# Altium PCB Dual-MCU-control-board.PcbDoc (part 3 of 3)
Units mm, origin at the board's own origin, x right, y up, seen from the top; angles counter-clockwise.
Board outline 69.24 x 57.01 mm, 4 copper layers (L1 SIGNAL, L2 GROUND, L3 GROUND, L4 SIGNAL), stack 1.571 mm thick; 90 components, 69 nets, 374 pads, 126 vias.
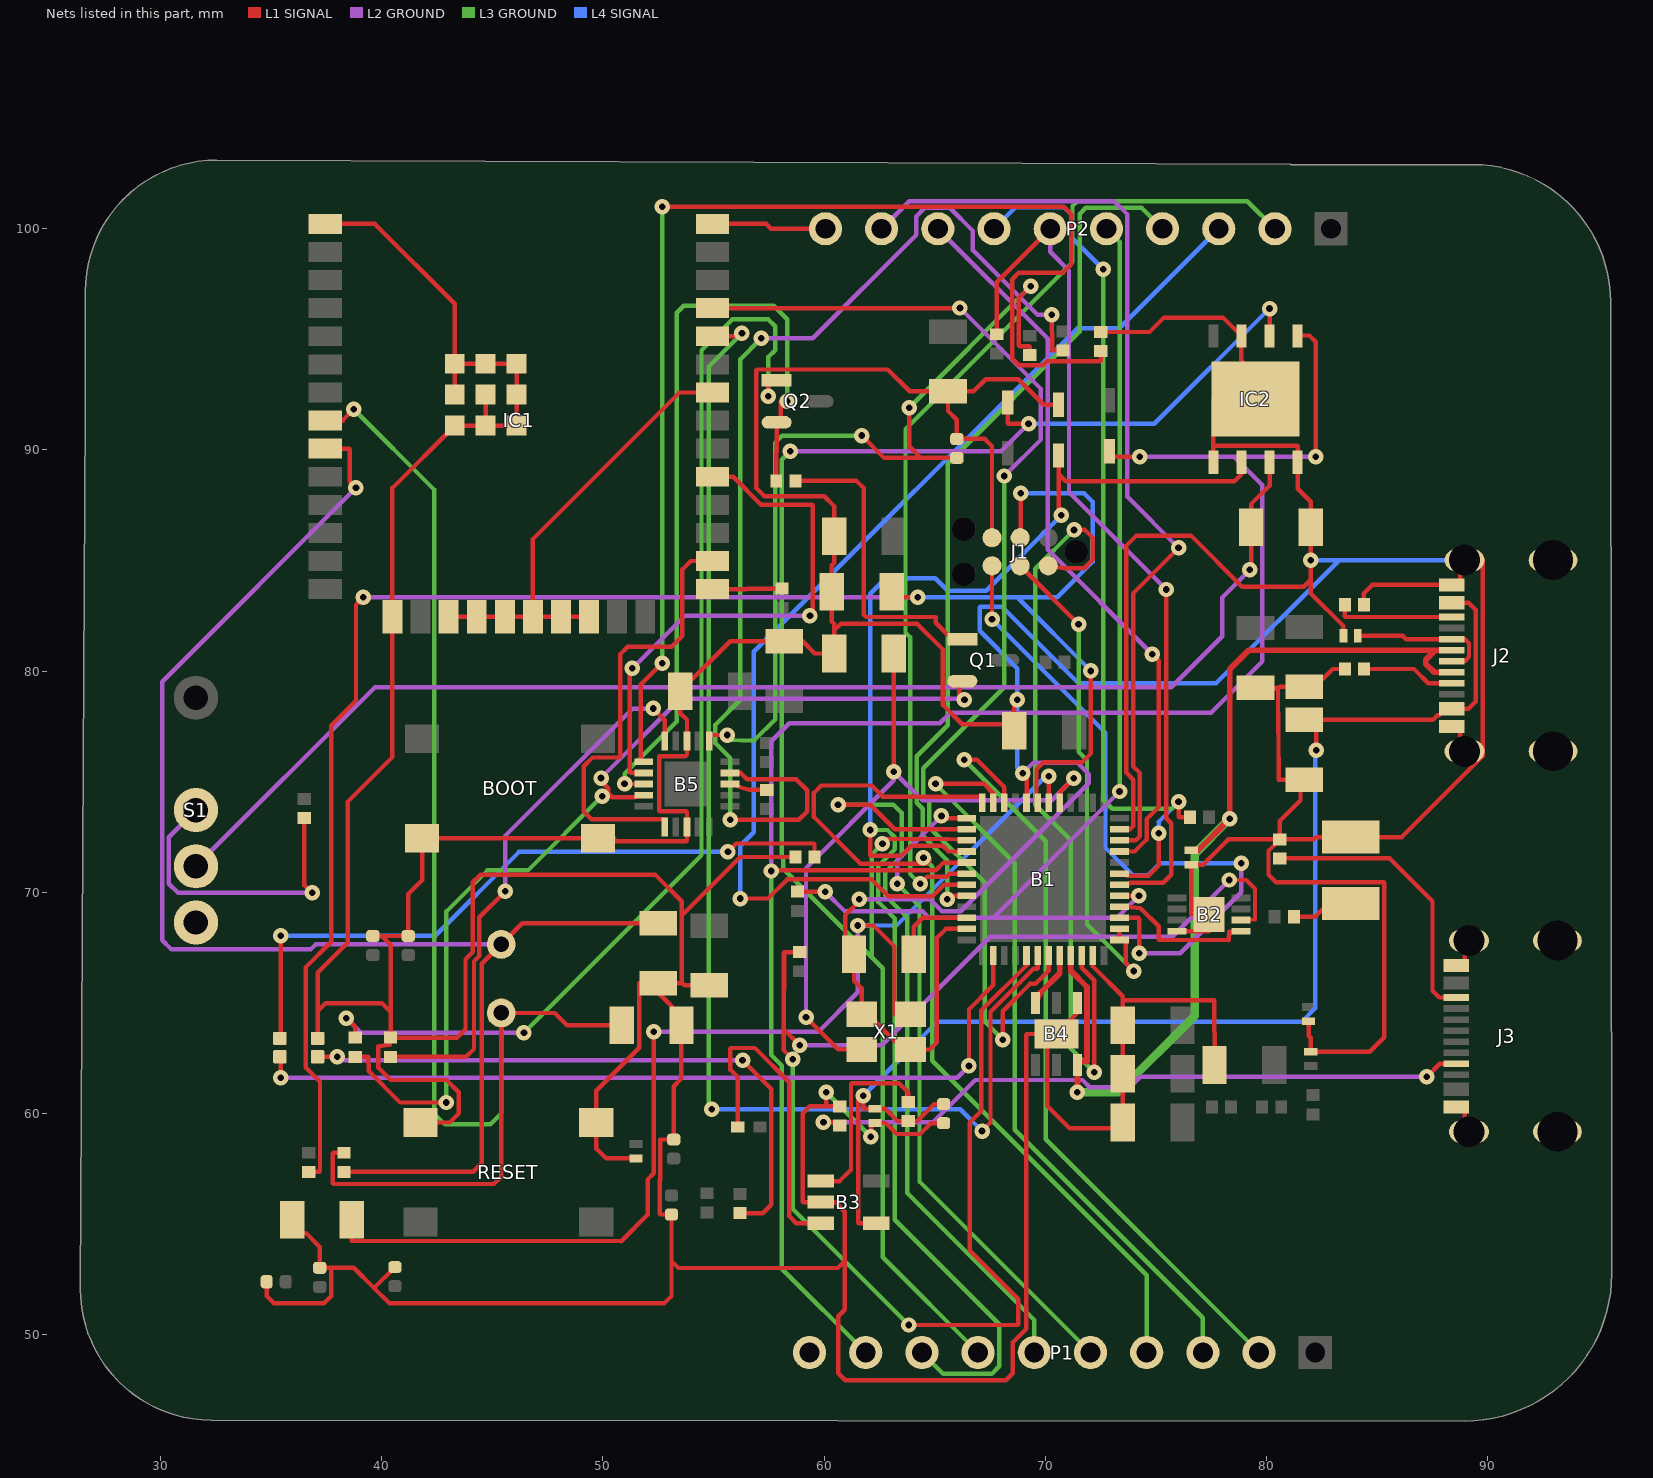
[diagram p4: the nets of this part, all layers, seen from the top]

## Via types
v1: diameter 0.7, hole 0.3, L1 SIGNAL to L4 SIGNAL, 126 vias

## Nets (pads, with @x,y where several pads share a name; then routed paths per layer and width w, separated by ;. In a path a pad name is that pad's centre, name@x,y a point inside that pad or via, vN(x,y) a via of type N, cw(c..) or ccw(c..) an arc to the next point about the centre after c; other vN are vias at no path point) (continued)
DTR_FTDI: B5.18 Q2.2 R28.1 | length 36.3
  L1 SIGNAL w0.2: v1(50.978,74.905) 50.982,74.9 B5.18@51.85,74.9 ; R28.1@57.836,88.6 57.836,89.916 57.849,89.929 Q2.2@57.849,91.25 58.039,91.25 58.039,92.177 58.064,92.202 v1(58.33,92.202)
  L3 GROUND w0.2: v1(50.978,74.905) 50.978,75.362 53.34,77.724 53.34,96.203 53.657,96.52 57.721,96.52 58.33,95.911 v1(58.33,92.202)
FTDI_RESET: B5.11 C27.1 R18.2 | length 39.2
  L1 SIGNAL w0.2: B5.11@54.8,76.85 54.8,77.114 v1(55.626,77.114) ; v1(61.697,90.653) 62.709,89.64 64.375,89.64 ; v1(63.845,91.912) 63.845,90.17 64.375,89.64 ; C27.1@66,89.64 64.375,89.64 ; R18.2@69.3,94.3 69.3,94.666 69.272,94.694 68.834,94.694 68.8,94.728 68.8,96.867 v1(69.342,97.409)
  L3 GROUND w0.2: v1(55.626,77.114) 55.626,76.89 56.832,76.864 57.785,77.817 57.785,90.335 58.102,90.653 v1(61.697,90.653) ; v1(63.845,91.912) v1(69.342,97.409)
FTDI_USB_N: B5.9 R16.2 | length 52
  L1 SIGNAL w0.2: B5.9@55.75,75.4 56.236,75.4 56.528,75.108 58.737,75.108 59.233,74.612 59.233,73.66 58.852,73.279 v1(55.753,73.279) ; v1(70.282,96.114) 70.307,94.5 R16.2@70.8,94.5
  L2 GROUND w0.2: v1(57.163,95.047) 59.487,95.047 64.16,99.72 64.16,100.559 64.552,100.95 65.674,100.95 66.726,99.898 66.726,99.035 69.647,96.114 v1(70.282,96.114)
  L3 GROUND w0.2: v1(55.753,73.279) 55.753,76.073 55.076,76.75 55.076,77.572 56.21,78.706 56.21,94.094 v1(57.163,95.047)
FTDI_USB_P: B5.8 R17.2 | length 1.7
  L1 SIGNAL w0.2: B5.8@55.75,74.9 56.035,74.813 56.619,74.632 R17.2@57.4,74.632
GND: B1.8 B1.23 B1.35 B1.47 B2.4 B2.9 B3.2 B4.4 B4.7 B5.3 B5.13 BOOT.3 BOOT.4 C1.1 C2.1 C3.2 C4.2 C5.1 C6.1 C7.1 C8.1 C9.1 C10.1 C11.1 C12.1 C13.1 C14.1 C15.1 C16.1 C17.2 C18.1 C19.1 C20.1 C21.1 C22.1 C23.2 C24.1 C25.2 C26.2 C27.2 C28.2 C29.2 D2.2 D3.1 D6.1 D7.1 D8.1 D9.1 D10.1 D11.1 D12.1 IC1.1 IC1.15 IC1.38 IC1.39 IC1.40 IC1.41 IC1.42 IC1.43 IC1.44 IC1.45 IC1.46 IC1.47 IC2.1 IC2.4 IC2.7 IC2.9 J1.5 J2.A1B12 J2.B1A12 J2.S1 J2.S2 J2.S3 J2.S4 J3.A1B12 J3.B1A12 J3.S1 J3.S2 J3.S3 J3.S4 P1.10 P2.10 R5.1 R10.2 R12.2 R20.2 R21.2 R22.1 R23.2 RESET.3 RESET.4 S1.3 X1.2 X1.4 | length 523.9
  L1 SIGNAL w0.2: C26.2@34.8,52.4 34.8,51.752 35.117,51.435 37.401,51.435 37.719,51.752 37.719,53.005 37.694,53.03 ; C13.1@35.95,55.2 35.95,54.599 36.576,54.599 37.2,53.975 C28.2@37.2,53.03 37.694,53.03 ; D3.1@37.1,63.4 37.1,64.634 ; IC1.1@37.45,100.22 39.688,100.22 43.3,96.608 IC1.39@43.3,93.9 ; C23.2@39.6,68.03 40.005,68.03 ; C25.2@40.6,53.06 39.655,52.115 ; RESET.4@41.75,59.6 43.077,59.6 43.485,60.008 43.485,60.96 42.926,61.519 40.411,61.519 39.853,62.078 39.853,63.043 40.375,63.119 R23.2@40.4,63.432 ; IC1.40@43.3,92.5 IC1.39@43.3,93.9 ; IC1.47@44.7,92.5 IC1.42@44.7,91.1 ; D9.1@51.5,57.975 50.145,57.975 49.7,58.42 RESET.3@49.7,59.6 49.7,61.036 51.638,62.974 51.638,65.9 C4.2@52.5,65.9 ; C20.1@54.8,65.8 53.694,65.8 53.594,65.9 53.543,65.9 ; IC1.38@54.95,100.22 57.379,100.22 57.599,100 P2.10@60.06,100 ; R5.1@58.7,71.6 56.21,71.6 53.569,68.958 ; v1(60.096,60.96) 60.096,60.357 60.122,60.332 ; R21.2@60.7,60.332 60.122,60.332 ; v1(61.595,69.698) 61.595,69.609 60.96,68.974 60.96,68.03 61.35,67.64 C19.1@61.35,67.2 61.35,66.009 61.7,65.659 X1.4@61.7,64.5 61.976,64.5 63.576,62.9 X1.2@63.9,62.9 64.77,62.9 65.1,63.23 65.1,67.945 65.505,68.35 B1.23@66.45,68.35 ; v1(62.103,58.953) 62.103,59.258 62.128,59.284 62.128,59.575 D12.1@62.3,59.575 62.789,59.575 63.283,59.08 64.338,59.08 64.828,59.57 C29.2@65.4,59.57 ; J1.5@67.59,86.035 67.59,90.17 67.26,90.5 C27.2@66,90.5 66,91.364 65.6,91.764 C1.1@65.6,92.65 ; C2.1@68.6,77.3 C2.1@68.6,77.597 ; v1(68.732,78.715) 68.6,78.582 C2.1@68.6,77.597 ; v1(68.986,75.387) 69.15,75.224 B1.8@69.15,74.05 ; D6.1@70.6,92.05 69.926,92.05 68.776,93.2 67.301,93.2 66.751,92.65 C1.1@65.6,92.65 ; B4.4@71.45,65 71.45,64.55 B4.7@70.5,63.6 ; B1.35@72.15,67.15 72.15,66.65 73.5,65.3 73.5,65.131 ; R22.1@72.5,95.332 74.707,95.332 75.362,95.987 78.028,95.987 IC2.7@78.865,95.15 78.865,94.031 79.5,93.396 IC2.9@79.5,92.3 77.595,92.3 77.595,90.17 ; B1.47@73.35,72.85 73.826,72.85 73.975,73 73.975,75.096 73.666,75.406 73.666,85.68 74.117,86.131 76.581,86.131 78.892,83.82 81.682,83.82 82,84.138 ; B2.4@75.95,68.25 77.4,68.25 B2.9@77.4,69 76.632,69 76.6,69.032 D10.1@76.6,71.25 77.126,71.25 78.276,72.4 R20.2@80.6,72.4 ; IC2.1@77.595,89.45 77.595,90.17 ; C16.1@77.65,62.2 77.63,65.131 73.5,65.131 ; C14.1@81.7,75.1 C14.1@81.534,75.1 ; D7.1@81.9,64.175 81.9,63.524 82,63.424 D8.1@82,62.8 84.669,62.8 85.319,63.449 85.319,70.434 85.293,70.46 80.429,70.46 80.086,70.802 80.086,71.876 80.6,72.39 R20.2@80.6,72.4 ; D11.1@83.475,81.6 83.475,82.042 82,83.517 82,84.138 ; R12.2@83.536,80.1 82.994,80.1 82.194,79.3 C5.1@81.7,79.3 80.619,79.3 80.569,79.25 C15.1@79.5,79.25 80.518,79.174 80.543,75.1 C14.1@81.534,75.1 ; R10.2@84.4,83 84.4,83.527 84.772,83.9 J2.B1A12@88.375,83.9 88.748,83.9 88.748,85.02 J2.S2@88.95,85.02 88.95,85.039 89.764,85.039 89.764,76.158 86.106,72.5 D2.2@83.8,72.5 82.244,72.5 82.144,72.4 R20.2@80.6,72.4 ; J2.A1B12@88.375,77.5 88.748,77.5 88.748,76.38 J2.S1@88.95,76.38 ; J3.A1B12@88.575,60.3 88.951,60.3 88.951,59.18 J3.S1@89.15,59.18 ; J3.B1A12@88.575,66.7 88.951,66.7 88.951,67.82 J3.S2@89.15,67.82 ; 37.1,64.634 37.1,66.37 38.456,67.726 38.456,74.092 40.485,76.121 IC1.15@40.485,82.46 40.485,88.285 IC1.41@43.3,91.1 IC1.42@44.7,91.1 ; 37.1,64.634 37.465,64.999 40.005,64.999 40.4,64.604 ; 37.694,53.03 38.74,53.03 39.655,52.115 ; 39.655,52.115 40.335,51.435 52.783,51.435 53.1,51.752 53.1,53.34 ; 40.005,68.03 40.386,68.03 C24.1@41.2,68.03 41.2,69.926 41.825,70.551 BOOT.3@41.825,72.45 BOOT.4@49.775,72.45 50.521,72.45 50.521,72.314 53.775,72.314 53.8,72.339 B5.3@53.8,72.95 53.8,73.635 53.775,73.66 52.578,73.66 52.553,73.685 52.553,76.124 52.578,76.149 53.724,76.149 53.8,76.225 B5.13@53.8,76.85 53.8,77.8 53.5,78.1 C10.1@53.5,79.1 55.75,81.35 C9.1@58.2,81.35 59.03,81.35 59.58,80.8 C12.1@60.45,80.8 60.45,81.839 ; 40.005,68.03 40.4,67.635 40.4,64.604 ; R23.2@40.4,63.432 43.404,63.432 43.79,63.817 43.79,66.983 44.115,67.308 44.115,70.455 44.45,70.79 52.375,70.79 53.569,69.596 53.569,68.958 ; R23.2@40.4,63.432 40.4,64.604 ; IC1.39@43.3,93.9 IC1.46@44.7,93.9 IC1.45@46.1,93.9 IC1.44@46.1,92.5 IC1.43@46.1,91.1 IC1.42@44.7,91.1 ; C4.2@52.5,65.9 53.543,65.9 ; C4.2@52.5,65.9 52.5,65.464 53.55,64.414 C3.2@53.55,64 53.55,61.589 53.2,61.239 C17.2@53.2,58.83 52.603,58.83 52.6,58.827 52.6,57 52.578,56.978 52.578,55.465 52.603,55.44 C22.1@53.1,55.44 53.1,53.34 ; 53.1,53.34 53.418,53.023 60.617,53.023 60.935,53.34 ; 53.543,65.9 53.569,65.925 53.569,68.958 ; 60.122,60.332 59.354,60.332 59.03,60.008 59.03,56.025 59.055,56 B3.2@59.85,56 60.497,56 60.935,55.562 60.935,53.34 ; 60.45,81.839 60.45,82.144 60.35,82.244 C18.1@60.35,83.6 60.35,84.785 60.45,84.885 C6.1@60.45,86.1 60.45,87.467 60.008,87.909 57.302,87.909 56.93,88.282 56.93,93.595 56.972,93.637 62.878,93.637 63.865,92.65 C1.1@65.6,92.65 ; 60.45,81.839 60.761,82.15 64.2,82.15 65.37,80.98 65.37,78.47 66.243,77.597 C2.1@68.6,77.597 ; 60.935,53.34 60.935,51.13 60.642,50.838 60.642,48.26 60.96,47.942 68.212,47.942 68.529,48.26 68.529,49.657 69.139,50.267 69.139,63.575 69.164,63.6 B4.7@70.079,63.6 ; B4.7@70.079,63.6 70.079,63.602 70.5,63.602 B4.7@70.5,63.6 ; B4.7@70.079,63.6 70.079,60.35 71.095,59.334 73.5,59.334 C11.1@73.5,59.6 73.5,60.681 C7.1@73.5,61.8 C8.1@73.5,64 73.5,65.131 ; B4.7@70.079,63.6 B4.7@70.5,63.6 ; 77.595,90.17 77.62,90.195 81.38,90.195 81.405,90.17 IC2.4@81.405,89.45 81.405,88.25 82,87.655 C21.1@82,86.5 v1(82,85.02) 82,84.138 ; R20.2@80.6,72.4 80.6,73.228 81.534,74.162 C14.1@81.534,75.1
  L2 GROUND w0.2: v1(61.595,69.698) 64.773,69.698 65.323,69.148 66.176,69.148 71.958,74.93 71.958,75.349 71.438,75.87 69.469,75.87 v1(68.986,75.387)
  L3 GROUND w0.2: v1(60.096,60.96) v1(62.103,58.953)
  L4 SIGNAL w0.2: v1(68.986,75.387) 68.732,75.641 v1(68.732,78.715) 68.732,80.124 67.031,81.826 67.031,82.88 67.056,82.906 68.047,82.906 71.501,79.451 77.718,79.451 83.287,85.02 ; v1(82,85.02) 83.287,85.02 ; J2.S2@88.95,85.02 83.287,85.02
GPIOA0: B1.10 P1.2 | length 35.4
  L1 SIGNAL w0.2: v1(66.331,75.997) 66.905,75.997 68.15,74.752 B1.10@68.15,74.05
  L3 GROUND w0.2: v1(66.331,75.997) 70.02,72.307 70.02,58.84 P1.2@79.66,49.2
GPIOA1: B1.11 P1.3 | length 33.9
  L1 SIGNAL w0.2: v1(65.037,74.905) 67.233,74.905 67.65,74.488 B1.11@67.65,74.05
  L3 GROUND w0.2: v1(65.037,74.905) 68.622,71.319 68.622,59.267 77.12,50.769 P1.3@77.12,49.2
GPIOA2/TX2: B1.12 P1.4 | length 42.4
  L1 SIGNAL w0.2: v1(64.491,71.564) 64.723,71.564 64.77,71.518 64.77,71.442 64.628,71.3 61.644,71.3 59.538,73.406 59.538,74.498 59.872,74.832 62.15,74.832 62.658,74.324 67.15,74.324 B1.12@67.15,74.05
  L3 GROUND w0.2: v1(64.491,71.564) 64.888,71.167 64.888,62.391 74.58,52.699 P1.4@74.58,49.2
GPIOA3/RX2: B1.13 P1.5 | length 29.9
  L1 SIGNAL w0.2: v1(65.303,73.457) 65.41,73.35 B1.13@66.45,73.35
  L2 GROUND w0.2: v1(63.306,70.383) 63.306,71.459 v1(65.303,73.457)
  L3 GROUND w0.2: v1(63.306,70.383) 64.313,69.376 64.313,56.927 P1.5@72.04,49.2
GPIOA4: B1.14 P1.6 | length 36.8
  L1 SIGNAL w0.2: v1(60.63,73.965) 62.08,73.965 63.195,72.85 B1.14@66.45,72.85
  L3 GROUND w0.2: v1(60.63,73.965) 63.132,73.965 63.5,73.596 63.5,71.645 62.756,70.9 62.756,69.867 63.754,68.868 63.754,56.413 69.5,50.667 P1.6@69.5,49.2
GPIOA5/SCK1: B1.15 D4.2 IC2.6 P1.7 | length 81.3
  L1 SIGNAL w0.2: v1(62.636,72.2) 62.851,72.415 65.658,72.415 B1.15@66.45,72.35 ; D4.2@68.3,92.15 68.3,91.211 68.325,91.186 v1(69.24,91.186) ; IC2.6@80.135,95.15 v1(80.135,96.393)
  L2 GROUND w0.2: v1(58.471,89.941) 67.996,89.941 v1(69.24,91.186)
  L3 GROUND w0.2: v1(58.471,89.941) 58.09,89.56 58.09,71.585 58.157,71.518 58.157,71.069 62.156,67.071 ; v1(62.636,72.2) 62.156,71.719 62.156,67.071 ; P1.7@66.96,49.2 62.653,53.507 62.653,66.573 62.156,67.071
  L4 SIGNAL w0.2: v1(69.24,91.186) 74.928,91.186 v1(80.135,96.393)
GPIOA6/MISO1: B1.16 D6.2 IC2.2 P1.8 | length 70.7
  L1 SIGNAL w0.2: v1(62.086,72.822) 62.086,71.679 62.116,71.649 63.476,71.649 63.941,72.115 65.358,72.115 65.623,71.85 B1.16@66.45,71.85 ; D6.2@70.6,89.75 70.6,88.9 ; v1(70.726,87.046) 70.6,87.172 70.6,88.9 ; IC2.2@78.865,89.45 78.865,88.9 78.547,88.582 70.917,88.582 70.6,88.9
  L3 GROUND w0.2: v1(62.086,72.822) 62.865,72.822 63.195,72.492 63.195,71.945 62.456,71.205 62.456,69.562 63.195,68.822 63.195,55.207 67.92,50.482 67.92,48.578 67.577,48.235 65.385,48.235 P1.8@64.42,49.2
  L4 SIGNAL w0.2: v1(62.086,72.822) 62.086,83.499 62.789,84.201 65.024,84.201 65.583,83.642 67.323,83.642 v1(70.726,87.046)
GPIOA7/MOSI1: B1.17 D5.2 IC2.5 P1.9 | length 87.6
  L1 SIGNAL w0.2: v1(57.607,70.968) 57.64,71 65.049,71 65.399,71.35 B1.17@66.45,71.35 ; D5.2@72.9,89.95 72.9,89.687 v1(74.27,89.687) ; IC2.5@81.405,95.15 81.405,95.174 81.94,95.174 82.22,94.894 v1(82.22,89.687)
  L2 GROUND w0.2: v1(57.607,70.968) 57.607,76.835 58.42,77.648 65.227,77.648 65.71,78.13 77.495,78.13 79.807,80.442 79.807,88.417 78.537,89.687 ; v1(74.27,89.687) 78.537,89.687 ; v1(82.22,89.687) 78.537,89.687
  L3 GROUND w0.2: v1(57.607,70.968) 57.607,62.654 58.09,62.171 58.09,52.99 P1.9@61.88,49.2
GPIOA8/SCL3: B1.29 B2.6 R26.2 | length 73.9
  L1 SIGNAL w0.2: v1(58.585,62.459) 58.166,62.878 58.166,63.83 ; R26.2@58.9,67.3 58.191,67.3 ; v1(58.903,63.094) 58.166,63.83 ; v1(63.83,50.444) 68.758,50.444 68.783,50.47 68.783,51.613 66.573,53.823 66.573,59.588 67.107,60.122 67.107,64.657 69.15,66.7 B1.29@69.15,67.15 ; v1(78.308,70.561) 79.083,70.561 79.477,70.168 79.477,68.775 B2.6@78.85,68.75 ; 58.166,63.83 58.166,67.275 58.191,67.3 ; 58.166,63.83 58.191,67.3
  L2 GROUND w0.2: v1(58.903,63.094) 62.611,63.094 67.513,67.996 75.743,67.996 v1(78.308,70.561)
  L3 GROUND w0.2: v1(58.585,62.459) 58.585,55.689 v1(63.83,50.444)
GPIOB0: B1.18 P2.2 | length 46.1
  L1 SIGNAL w0.2: v1(64.338,70.383) 64.655,70.7 65.518,70.7 65.668,70.85 B1.18@66.45,70.85
  L3 GROUND w0.2: v1(64.338,70.383) 63.887,70.835 63.887,81.528 63.678,81.737 63.678,90.932 71.226,98.481 71.226,101.034 71.443,101.25 79.13,101.25 P2.2@80.38,100
GPIOB1: B1.19 P2.3 | length 51.5
  L1 SIGNAL w0.2: v1(56.21,69.723) 57.468,69.723 58.331,70.587 62.145,70.587 62.907,69.825 64.897,69.825 65.422,70.35 B1.19@66.45,70.35
  L4 SIGNAL w0.2: v1(56.21,69.723) 56.21,72.111 56.82,72.72 56.82,80.874 71.45,95.504 73.344,95.504 P2.3@77.84,100
GPIOB2: B1.20 P2.4 | length 39.8
  L1 SIGNAL w0.2: v1(65.557,69.698) 65.71,69.85 B1.20@66.45,69.85
  L3 GROUND w0.2: v1(65.557,69.698) 65.557,71.455 64.453,72.559 64.453,73.788 64.187,74.055 64.187,76.157 65.583,77.553 65.583,89.383 71.552,95.352 71.552,100.671 71.831,100.95 74.35,100.95 P2.4@75.3,100
GPIOB4/SDA3: B1.40 B2.5 | length 6.8
  L1 SIGNAL w0.2: B1.40@73.35,69.35 73.685,69.35 74.295,69.291 75.12,68.466 75.12,67.869 78.283,67.843 78.308,68.225 B2.5@78.85,68.25
GPIOB5: B1.41 P2.5 R25.2 | length 51
  L1 SIGNAL w0.2: R25.2@58.8,70.032 v1(60.046,70.032) ; B1.41@73.35,69.85 v1(74.231,69.85)
  L2 GROUND w0.2: v1(60.046,70.032) 60.939,69.139 64.462,69.139 64.753,68.848 67.641,68.848 ; v1(73.355,74.562) 67.641,68.848 ; v1(74.231,69.85) 73.229,68.848 67.641,68.848
  L3 GROUND w0.2: P2.5@72.76,100 73.355,99.405 v1(73.355,74.562)
GPIOB6/SCL1: B1.42 P2.6 R3.2 | length 39.8
  L1 SIGNAL w0.2: R3.2@67.8,95.232 67.8,97.58 P2.6@70.22,100 ; B1.42@73.35,70.35 73.736,70.35 73.82,70.434 75.324,70.434 75.692,70.802 75.692,73.127 75.463,73.355 v1(75.463,83.693)
  L2 GROUND w0.2: P2.6@70.22,100 70.22,98.957 71.069,98.108 71.069,88.087 v1(75.463,83.693)
GPIOB7/SDA1: B1.43 P2.7 R2.2 | length 41.3
  L1 SIGNAL w0.2: B1.43@73.35,70.85 73.706,70.85 73.706,70.75 74.662,70.75 75.133,71.222 v1(75.133,72.682) ; v1(76.022,74.092) 76.022,73.425 76.048,73.4 R2.2@76.536,73.4
  L3 GROUND w0.2: v1(72.619,98.171) 72.619,74.193 73.025,73.787 75.717,73.787 v1(76.022,74.092)
  L4 SIGNAL w0.2: P2.7@67.68,100 68.645,100.965 70.853,100.965 71.171,100.647 71.171,99.619 v1(72.619,98.171) ; v1(75.133,72.682) 75.133,73.203 v1(76.022,74.092)
GPIOB8: B1.45 P2.8 | length 33.4
  L1 SIGNAL w0.2: B1.45@73.35,71.85 74.035,71.85 74.575,72.39 74.575,73.304 75.133,73.862 75.133,80.467 v1(74.828,80.772)
  L2 GROUND w0.2: P2.8@65.14,100 70.104,95.036 70.104,85.496 v1(74.828,80.772)
GPIOB9: B1.46 P2.9 | length 42.9
  L1 SIGNAL w0.2: B1.46@73.35,72.35 74.092,72.35 74.275,72.533 74.275,75.396 73.966,75.706 73.966,83.516 v1(76.022,85.573)
  L2 GROUND w0.2: P2.9@62.6,100 63.85,101.25 73.108,101.25 73.711,100.647 73.711,87.884 v1(76.022,85.573)
"LED Anode": B1.26 D1.2 | length 37.8
  L1 SIGNAL w0.2: D1.2@35.4,62.57 35.433,62.57 v1(35.433,61.62) ; v1(66.548,62.154) 66.548,64.709 67.65,65.811 B1.26@67.65,67.15
  L2 GROUND w0.2: v1(35.433,61.62) 66.015,61.62 v1(66.548,62.154)
"LED Cathode": D1.1 R5.2 | length 31.1
  L1 SIGNAL w0.2: D1.1@35.4,63.4 35.433,63.4 v1(35.433,68.047) ; v1(55.651,71.831) 56.032,72.212 59.539,72.212 59.564,72.187 R5.2@59.564,71.6
  L4 SIGNAL w0.2: v1(35.433,68.047) 42.418,68.047 46.203,71.831 v1(55.651,71.831)
"MCU OSC IN": B1.5 C12.2 X1.1 | length 31.7
  L1 SIGNAL w0.2: v1(59.182,64.361) 60.642,62.9 X1.1@61.7,62.9 ; v1(63.15,75.455) C12.2@63.15,80.8 ; B1.5@70.65,74.05 70.65,74.524 v1(71.285,75.159)
  L2 GROUND w0.2: v1(59.182,64.361) 59.182,71.097 63.15,75.065 v1(63.15,75.455) 64.443,74.161 70.288,74.161 v1(71.285,75.159)
"MCU OSC OUT": B1.6 C13.2 X1.3 | length 55.3
  L1 SIGNAL w0.2: C13.2@38.65,55.2 38.65,54.254 50.825,54.229 52.019,55.423 52.019,57.019 52.3,57.3 v1(52.3,63.703) ; v1(61.519,68.504) 62.23,68.504 63.182,67.551 63.182,64.513 ; B1.6@70.15,74.05 v1(70.15,75.248) ; 63.182,64.513 X1.3@63.9,64.5 63.195,64.5 63.182,64.513
  L2 GROUND w0.2: v1(52.3,63.703) 59.741,63.703 61.519,65.481 v1(61.519,68.504)
  L4 SIGNAL w0.2: v1(61.519,68.504) 63.271,68.504 70.015,75.248 v1(70.15,75.248)
NetB3_1: B3.1 R24.1 | length 8.7
  L1 SIGNAL w0.2: B3.1@59.85,56.95 60.697,56.95 61.214,57.468 61.214,61.351 61.239,61.376 63.384,61.376 63.8,60.96 R24.1@63.8,60.532
NetB3_3: B3.3 L1.2 | length 14.6
  L1 SIGNAL w0.2: L1.2@56.1,59.4 56.1,61.654 55.762,61.993 55.762,62.941 55.787,62.967 56.871,62.967 58.42,61.417 58.42,55.367 58.737,55.05 B3.3@59.85,55.05
NetB5_15: B5.15 R23.1 | length 24.9
  L1 SIGNAL w0.2: R23.1@40.4,62.568 43.815,62.568 44.171,62.924 44.171,66.886 44.415,67.13 44.415,68.875 v1(45.593,70.053) ; v1(52.28,78.315) 52.8,77.794 B5.15@52.8,76.85
  L2 GROUND w0.2: v1(45.593,70.053) 45.593,72.568 51.333,78.308 52.273,78.308 v1(52.28,78.315)
NetB5_16: B5.16 R22.2 | length 57.7
  L1 SIGNAL w0.2: B5.16@51.85,75.9 51.714,75.9 51.714,79.4 v1(52.68,80.366) ; v1(52.68,100.99) 70.841,100.99 71.171,100.66 71.171,98.387 70.802,98.019 68.797,98.019 68.5,97.721 68.5,94.139 68.809,93.83 69.875,93.83 70.051,94.005 72.475,94.005 72.5,94.031 R22.2@72.5,94.468
  L3 GROUND w0.2: v1(52.68,80.366) v1(52.68,100.99)
NetC3_1: C3.1 IC1.8 R4.2 Y1.1 | length 65.5
  L1 SIGNAL w0.2: IC1.8@37.45,91.33 38.231,91.33 v1(38.741,91.84) ; R4.2@38.3,58.232 37.821,58.232 37.795,58.207 37.795,56.845 37.821,56.82 45.07,56.82 45.4,57.15 Y1.1@45.4,64.55 47.828,64.55 48.378,64 C3.1@50.85,64
  L3 GROUND w0.2: v1(38.741,91.84) 42.367,88.214 42.367,60.008 42.862,59.512 44.905,59.512 45.4,60.008 Y1.1@45.4,64.55
NetC4_1: C4.1 IC1.9 R4.1 Y1.2 | length 66.8
  L1 SIGNAL w0.2: IC1.9@37.45,90.06 38.532,90.06 38.557,90.035 38.557,88.57 v1(38.837,88.29) ; R4.1@38.3,57.368 44.133,57.368 44.526,57.762 44.526,66.776 Y1.2@45.4,67.65 46.35,68.6 C4.1@52.5,68.6
  L2 GROUND w0.2: v1(38.837,88.29) 30.074,79.527 30.074,67.843 30.48,67.437 36.805,67.437 37.018,67.65 Y1.2@45.4,67.65
NetC21_2: C21.2 IC2.3 S1.2 | length 59.5
  L1 SIGNAL w0.2: v1(79.248,84.582) 79.3,84.634 C21.2@79.3,86.5 79.3,87.554 80.135,88.389 IC2.3@80.135,89.45
  L2 GROUND w0.2: S1.2@31.6,71.18 39.694,79.274 75.693,79.274 78.001,81.583 78.001,83.335 v1(79.248,84.582)
NetD2_1: D2.1 R7.2 | length 2.8
  L1 SIGNAL w0.2: R7.2@81.232,68.9 82.194,68.9 82.794,69.5 D2.1@83.8,69.5
NetD3_2: D3.2 R9.1 | length 27.9
  L1 SIGNAL w0.2: D3.2@37.1,62.57 v1(37.998,62.57) ; R9.1@56.2,55.5 57.227,55.5 57.607,55.88 57.607,61.112 v1(56.312,62.408)
  L2 GROUND w0.2: v1(37.998,62.57) 38.161,62.408 v1(56.312,62.408)
NetD11_2: D11.2 J2.A6 J2.B6 | length 6.6
  L1 SIGNAL w0.2: D11.2@84.125,81.6 86.157,81.6 86.307,81.45 J2.B6@88.375,81.45 88.955,81.45 89.15,81.255 89.15,80.645 88.955,80.45 J2.A6@88.375,80.45
NetIC1_17: IC1.17 IC1.18 IC1.19 IC1.20 IC1.21 IC1.22 IC1.32 | length 20.7
  L1 SIGNAL w0.2: IC1.17@43.025,82.46 IC1.18@44.295,82.46 IC1.19@45.565,82.46 IC1.20@46.835,82.46 ; IC1.22@49.375,82.46 IC1.21@48.105,82.46 IC1.20@46.835,82.46 ; IC1.32@54.95,92.6 53.459,92.6 46.835,85.976 IC1.20@46.835,82.46
NetIC1_25: IC1.25 R27.2 | length 3.2
  L1 SIGNAL w0.2: IC1.25@54.95,83.71 56.49,83.71 56.512,83.732 R27.2@58.1,83.732
NetJ2_A5: J2.A5 R12.1 | length 4.2
  L1 SIGNAL w0.2: R12.1@84.4,80.1 86.665,80.1 87.315,79.45 J2.A5@88.375,79.45
NetJ2_B5: J2.B5 R10.1 | length 5.4
  L1 SIGNAL w0.2: R10.1@83.536,83 83.536,82.48 83.566,82.45 J2.B5@88.375,82.45
NetJ3_A5: J3.A5 R21.1 | length 30.8
  L1 SIGNAL w0.2: v1(59.969,59.614) 60.7,59.614 R21.1@60.7,59.468 ; v1(87.249,61.671) 87.828,62.25 J3.A5@88.575,62.25
  L2 GROUND w0.2: v1(59.969,59.614) 64.922,59.614 66.827,61.519 71.679,61.519 72.009,61.189 73.812,61.189 74.295,61.671 v1(87.249,61.671)
NetJ3_B5: J3.B5 R20.1 | length 12.9
  L1 SIGNAL w0.2: R20.1@80.6,71.536 85.563,71.536 87.5,69.599 87.5,65.558 87.808,65.25 J3.B5@88.575,65.25
NetQ1_1: Q1.1 R28.2 | length 14
  L1 SIGNAL w0.2: R28.2@58.7,88.6 61.463,88.6 61.798,88.265 61.798,82.55 61.898,82.45 65.04,82.45 65.04,82.194 65.784,81.45 Q1.1@66.249,81.45
NetQ2_1: Q2.1 R29.2 | length 52
  L1 SIGNAL w0.2: v1(38.405,64.313) 38.417,64.313 38.8,63.93 R29.2@38.8,63.432 ; v1(57.48,92.431) 57.48,93.15 Q2.1@57.849,93.15
  L2 GROUND w0.2: v1(38.405,64.313) 39.065,63.652 v1(46.431,63.652)
  L3 GROUND w0.2: v1(46.431,63.652) 54.458,71.679 54.458,94.513 55.855,95.91 57.468,95.91 57.785,95.593 57.785,94.513 57.48,94.209 v1(57.48,92.431)
NetR8_1: R8.1 S1.1 | length 14
  L1 SIGNAL w0.2: R8.1@36.5,73.368 36.5,70.332 v1(36.855,69.977)
  L2 GROUND w0.2: S1.1@31.6,73.72 30.378,72.498 30.378,70.396 30.797,69.977 v1(36.855,69.977)
NRST: B1.7 C18.2 J1.3 R6.1 | length 83.8
  L1 SIGNAL w0.2: R6.1@36.7,57.368 37.186,57.368 37.211,57.393 37.211,61.443 36.576,62.078 36.576,66.624 37.719,67.767 37.719,77.546 38.837,78.664 38.837,83.007 v1(39.167,83.337) ; C18.2@63.05,83.6 63.05,83.337 v1(64.237,83.337) ; J1.3@68.86,86.035 68.885,86.06 v1(68.885,88.036) ; B1.7@69.65,74.05 69.65,74.161 69.6,74.161 69.6,75.565 69.927,75.892 71.676,75.892 72.06,76.275 v1(72.06,80.01)
  L2 GROUND w0.2: v1(39.167,83.337) v1(64.237,83.337)
  L4 SIGNAL w0.2: v1(64.237,83.337) 68.732,83.337 ; v1(68.885,88.036) 71.755,88.036 72.136,87.655 72.136,84.938 70.536,83.337 68.732,83.337 ; v1(72.06,80.01) 68.732,83.337
RTS_FTDI: B5.19 Q1.2 R29.1 | length 45.1
  L1 SIGNAL w0.2: R29.1@38.8,62.568 39.395,62.568 39.421,61.912 40.831,60.503 v1(42.926,60.503) ; v1(49.914,75.171) 49.914,75.036 50.238,74.712 50.238,74.487 50.379,74.346 ; v1(49.962,74.346) 50.379,74.346 ; B5.19@51.85,74.4 51.425,74.3 50.425,74.3 50.379,74.346 ; Q1.2@66.249,79.55 66.116,79.55 66.116,78.943 v1(66.345,78.715)
  L2 GROUND w0.2: v1(49.914,75.171) 53.499,78.757 66.303,78.757 v1(66.345,78.715)
  L3 GROUND w0.2: v1(42.926,60.503) 42.926,69.139 44.78,70.993 46.609,70.993 v1(49.962,74.346)
RXD_FTDI: B5.1 IC1.26 | length 20.3
  L1 SIGNAL w0.2: B5.1@52.8,72.95 52.8,73.304 49.488,73.304 49.132,73.66 49.132,75.701 49.53,76.098 50.749,76.098 50.775,76.124 50.775,80.759 51.117,81.102 53.099,81.102 53.594,81.597 53.594,84.599 53.975,84.98 IC1.26@54.95,84.98
SWCLK: B1.37 B1.38 J1.4 | length 22.8
  L1 SIGNAL w0.2: J1.4@68.86,84.765 v1(71.501,82.124) ; B1.38@73.35,68.35 B1.37@73.35,67.85 73.635,67.85 73.635,66.804 v1(73.992,66.446)
  L3 GROUND w0.2: v1(71.501,82.124) 71.501,76.352 71.882,75.971 71.882,68.557 v1(73.992,66.446)
SWDIO: B1.34 J1.2 | length 36
  L1 SIGNAL w0.2: J1.2@70.13,84.765 70.866,84.658 71.755,84.658 72.136,85.039 72.136,86.042 71.793,86.385 v1(71.298,86.385) ; B1.34@71.65,67.15 71.65,66.589 72.212,66.027 v1(72.212,61.874)
  L3 GROUND w0.2: v1(71.298,86.385) 69.545,84.633 69.545,73.965 71.145,72.365 71.145,62.941 v1(72.212,61.874)
SWO: B1.39 J1.6 | length 31.3
  L1 SIGNAL w0.2: v1(67.59,82.346) J1.6@67.59,84.765 ; B1.39@73.35,68.85 74.193,68.85 74.244,68.799 v1(74.244,67.246)
  L2 GROUND w0.2: v1(74.244,67.246) 76.094,67.246 78.858,70.011 v1(78.858,71.323)
  L4 SIGNAL w0.2: v1(67.59,82.346) 72.72,77.216 72.72,72.012 73.959,70.773 74.636,70.773 75.186,71.323 v1(78.858,71.323)
TXD_FTDI: B5.17 IC1.29 | length 24.5
  L1 SIGNAL w0.2: v1(51.333,80.137) 51.206,80.01 51.206,75.438 51.244,75.4 B5.17@51.85,75.4 ; IC1.29@54.95,88.79 55.888,88.79 57.15,87.528 59.461,87.528 59.487,87.503 59.487,82.626 v1(59.36,82.499)
  L2 GROUND w0.2: v1(51.333,80.137) 53.696,82.499 v1(59.36,82.499)
USART_RX1: B1.31 IC1.35 | length 54.3
  L1 SIGNAL w0.2: IC1.35@54.95,96.41 66.133,96.41 v1(66.142,96.418) ; v1(68.072,63.348) 68.072,64.632 69.302,65.862 69.545,65.862 70.15,66.467 B1.31@70.15,67.15
  L2 GROUND w0.2: v1(66.142,96.418) 69.799,92.761 69.799,90.475 v1(68.148,88.824)
  L3 GROUND w0.2: v1(68.072,63.348) 67.259,64.16 67.259,70.443 64.753,72.949 64.753,74.088 64.487,74.355 64.487,75.618 68.148,79.28 v1(68.148,88.824)
USART_TX1: B1.30 IC1.34 | length 58.9
  L1 SIGNAL w0.2: IC1.34@54.95,95.14 56.151,95.14 v1(56.286,95.275) ; v1(67.139,59.214) 67.522,59.597 67.522,64.604 69.466,66.548 69.625,66.548 69.65,66.573 B1.30@69.65,67.15
  L3 GROUND w0.2: v1(54.915,60.198) 54.776,60.337 54.776,93.765 v1(56.286,95.275)
  L4 SIGNAL w0.2: v1(54.915,60.198) 66.154,60.198 v1(67.139,59.214)
USB_D_N: B1.32 B4.6 | length 2.6
  L1 SIGNAL w0.26: B4.6@69.55,65 69.787,65.481 70.65,66.345 B1.32@70.65,67.15
USB_D_P: B1.33 B4.3 D10.2 J2.A7 J2.B7 | length 44.8
  L1 SIGNAL w0.26: B1.33@71.15,67.15 71.15,66.461 71.882,65.729 71.882,62.382 71.857,62.357 71.45,62.357 B4.3@71.45,62.2 v1(71.45,60.96) ; D10.2@76.6,71.9 76.904,71.9 v1(78.334,73.33) 78.334,80.086 79.197,80.95 87.63,80.95 ; J2.B7@88.375,79.95 87.576,79.95 87.198,80.328 87.198,80.518 87.63,80.95 ; J2.A7@88.375,80.95 87.63,80.95
  L3 GROUND w0.381: v1(71.45,60.96) 73.292,60.96 76.753,64.421 76.753,71.749 v1(78.334,73.33)
VBUS: B3.4 C14.2 C29.1 D12.2 J2.A4B9 J2.B4A9 R24.2 | length 60
  L1 SIGNAL w0.2: B3.4@62.35,55.05 61.57,55.05 61.544,55.075 61.544,60.579 v1(61.773,60.808) 61.773,60.25 61.798,60.225 D12.2@62.3,60.225 62.763,60.225 63.32,59.668 R24.2@63.8,59.668 64.211,59.668 64.973,60.43 C29.1@65.4,60.43 ; C14.2@81.7,77.8 82.245,77.8 v1(82.245,76.429) ; C14.2@82.245,77.805 87.522,77.805 87.717,78 87.8,78 88.1,78.3 J2.A4B9@88.375,78.3 89.129,78.3 89.45,78.621 89.45,82.779 89.129,83.1 J2.B4A9@88.375,83.1
  L4 SIGNAL w0.2: v1(61.773,60.808) 65.126,64.16 81.597,64.16 82.194,64.757 82.194,76.378 v1(82.245,76.429)
VCAP1: B1.22 C19.2 | length 3.8
  L1 SIGNAL w0.2: C19.2@64.05,67.2 64.05,68.447 64.453,68.85 B1.22@66.45,68.85
pads on no net: B1.2 B1.3 B1.4 B1.21 B1.25 B1.27 B1.28 B1.49 B2.1 B2.2 B2.3 B2.7 B4.2 B4.5 B5.2 B5.4 B5.5 B5.6 B5.7 B5.14 B5.20 B5.21 D4.1 D5.1 IC1.4 IC1.5 IC1.6 IC1.7 IC1.10 IC1.11 IC1.12 IC1.13 IC1.14 IC1.16 IC1.23 IC1.24 IC1.27 IC1.28 IC1.30 IC1.31 IC1.33 IC1.36 IC1.37 J1.MH J2.A8 J2.B8 J3.A8 J3.B8 R19.1 S1.M
copper on no net: | length 2.1
  L1 SIGNAL w0.2: 63.4,56.4 64.237,56.4 64.537,56.7 65.4,56.7

## Polygon pours and split planes (outlines as drawn)
GND on Mechanical 1 (solid): 28.3,99.9 28.6,99.6 28.6,48 91.5,48 95.5,52 95.5,96.731 89.331,102.9 34.4,102.9 34.1,103.2
GND on L1 SIGNAL "NONET_L-01_P-001" (solid, pour order 0): 66,76.4 66,75.4 65.9,75.3 64.4,75.3 64,74.9 63.1,74.9 63.1,75.9 63.6,76.4
GND on L3 GROUND "NONET_L-01_P-001" (solid, pour order 10): 34.073,103.256 89.041,102.879 cw(c89.493,96.909) 95.48,96.912 95.606,52.3 cw(c88.92,52.801) 89.2,46.102 32.413,46.102 cw(c32.638,53.428) 28.769,47.203 cw(c33.217,52.463) 26.411,51.401 26.587,97.816 cw(c32.753,97.201)

## Silkscreen, mask and mechanical layers (free items; w line width, h text height)
Top Overlay:
  text "Board" at 86.954,87.054 h1.52
  text "UART" at 94.246,57.546 h1.52 r180
Bottom Overlay:
  text "GND" at 59.354,89.354 h1.52 r270
  text "GPIOB1" at 77.254,89.354 h1.52 r270
  text "GPIOB9" at 61.754,89.254 h1.52 r270
  text "GPIOB8" at 64.554,89.254 h1.52 r270
  text "GPIOB7" at 67.154,89.254 h1.52 r270
  text "GPIOB6" at 69.554,89.254 h1.52 r270
  text "GPIOB5" at 72.154,89.254 h1.52 r270
  text "GPIOB2" at 74.654,89.254 h1.52 r270
  text "GPIOB0" at 79.754,89.254 h1.52 r270
  text "+3V3" at 82.254,89.154 h1.52 r270
  text "GND" at 58.554,51.854 h1.52 r270
  text "GPIOA1" at 76.454,51.854 h1.52 r270
  text "GPIOA7" at 60.954,51.754 h1.52 r270
  text "GPIOA6" at 63.754,51.754 h1.52 r270
  text "GPIOA5" at 66.354,51.754 h1.52 r270
  text "GPIOA4" at 68.754,51.754 h1.52 r270
  text "GPIOA3" at 71.354,51.754 h1.52 r270
  text "GPIOA2" at 73.854,51.754 h1.52 r270
  text "GPIOA0" at 78.954,51.754 h1.52 r270
  text "+3V3" at 81.454,51.654 h1.52 r270
Mechanical 1:
  lines w0.2: 26.6,91.733 26.371,52.092 ccw(c32.326,52.092) 32.299,46.137 88.934,46.097 ccw(c88.934,52.77) 95.606,52.77 95.548,96.583 ; 32.553,103.102 81.089,102.91 ; 81.089,102.9 89.331,102.9 cw(c89.331,96.683) 95.548,96.683